# Allegro board megaHeatv2_AutoRouted.brd
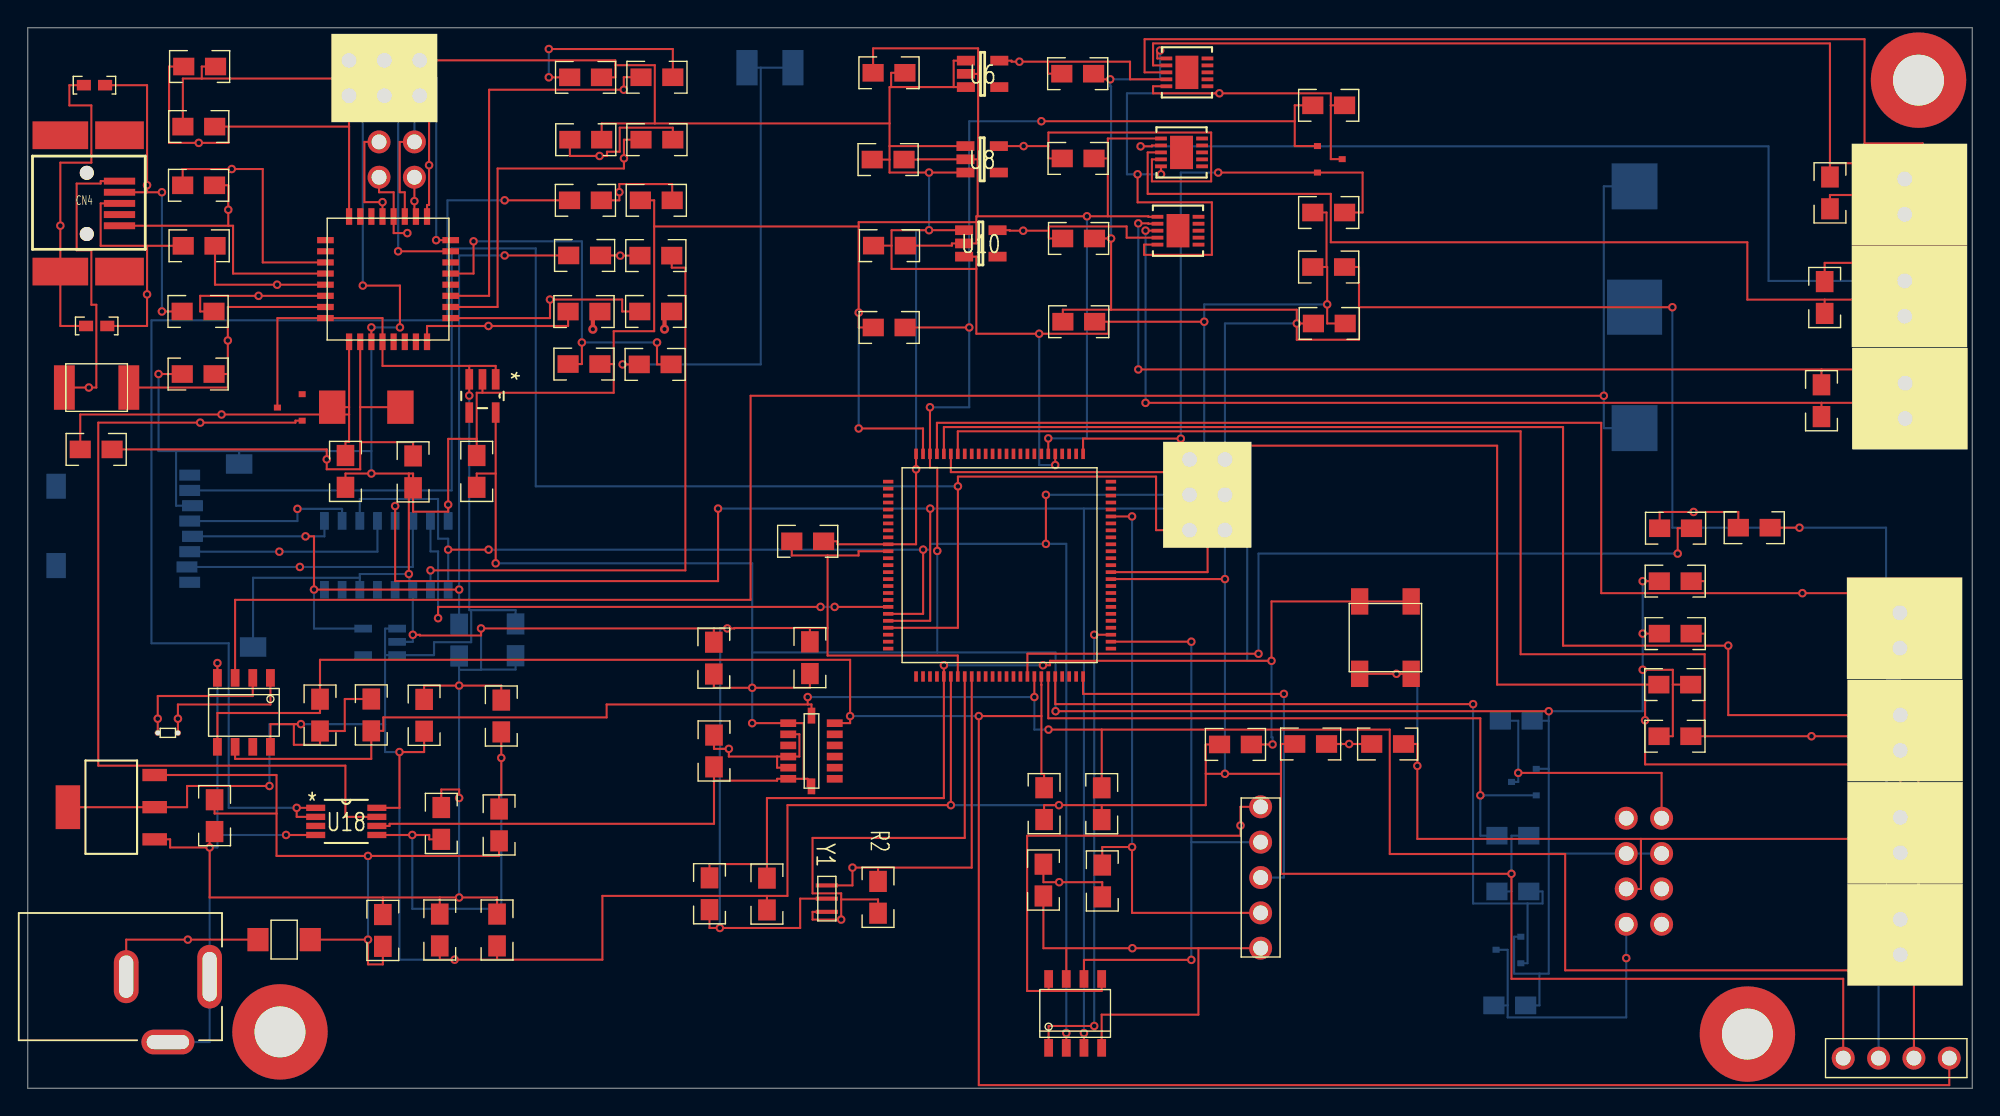
[diagram p0: board, top side]
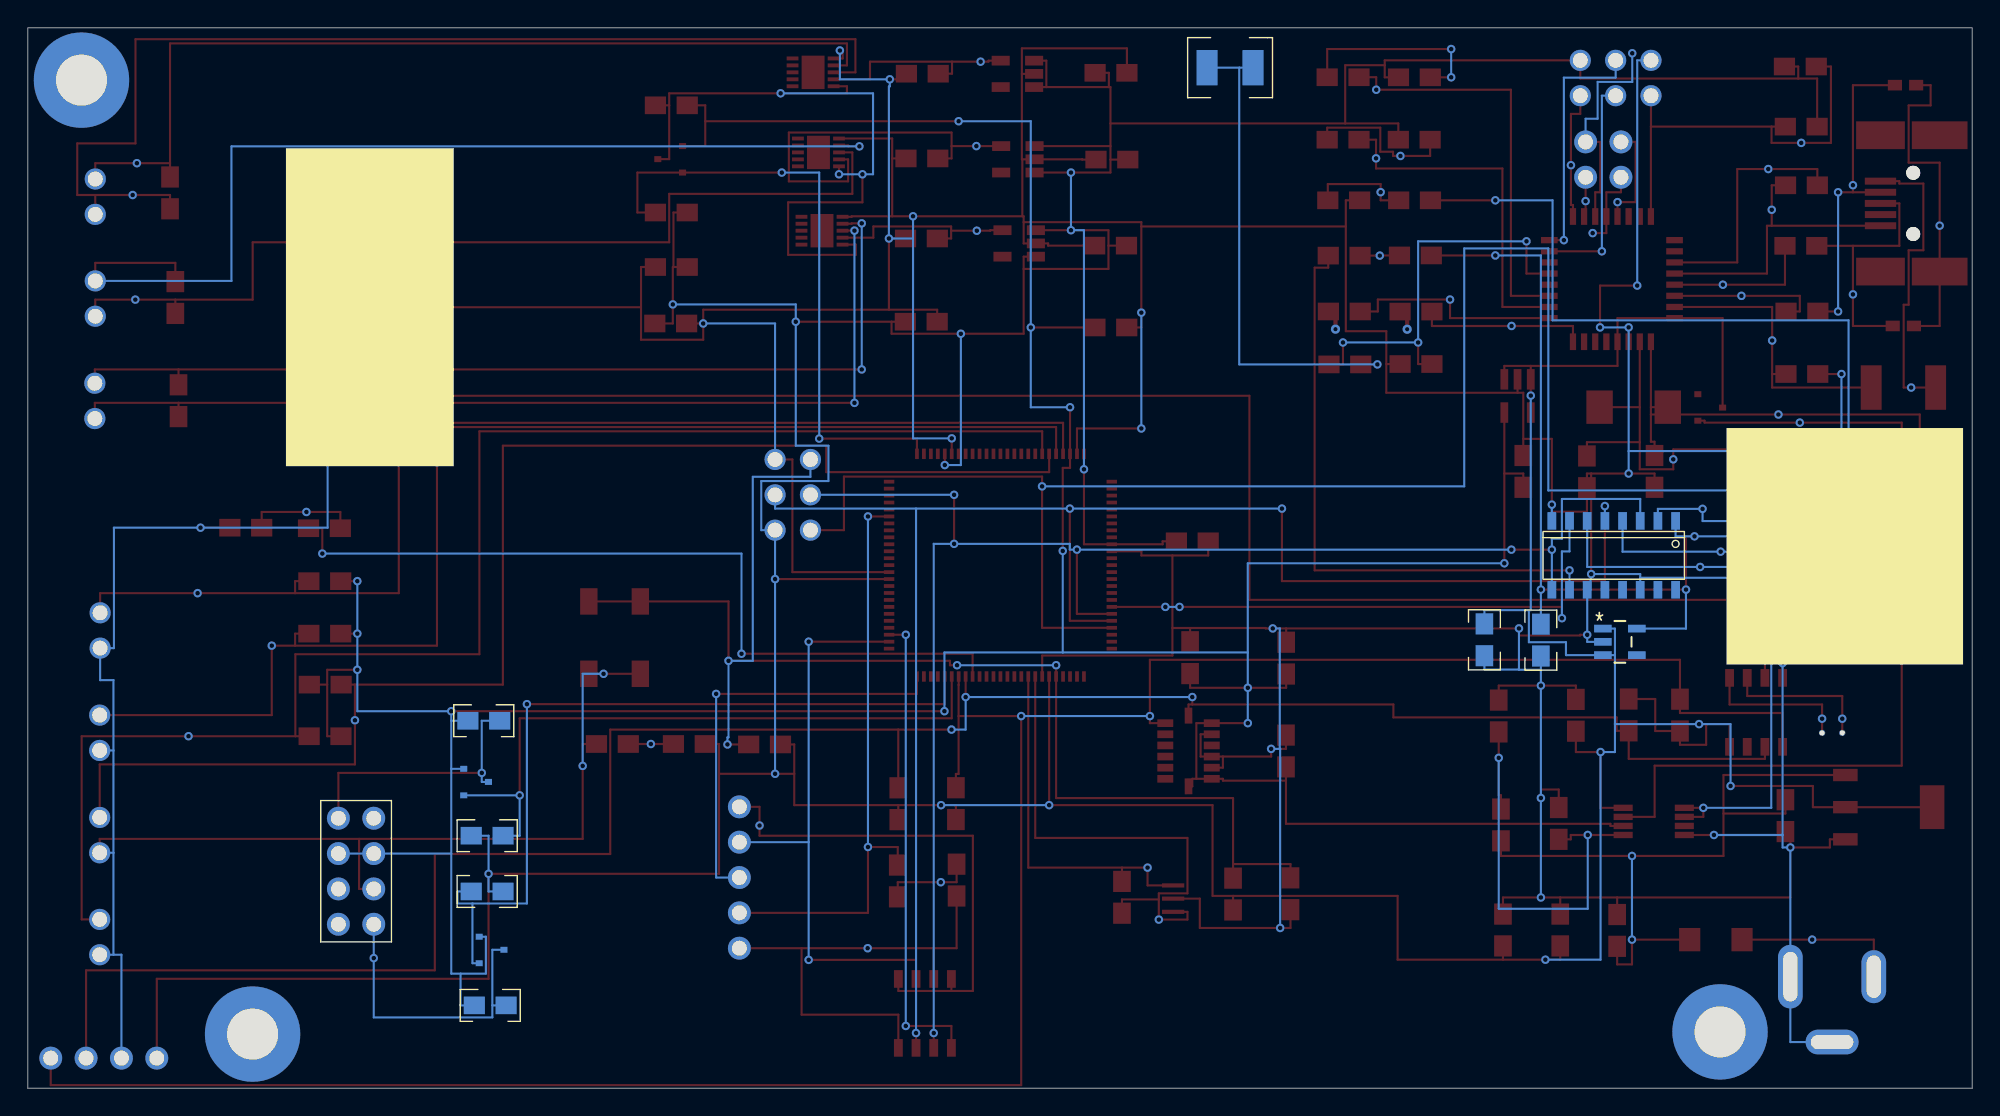
[diagram p1: board, bottom side, seen from below]

Outline 139.7 x 76.2 mm; copper layers: TOP, BOTTOM. Coordinates in mm from the lower left corner of the outline.
Outline path: 0,76.2 139.7,76.2 139.7,0 0,0 0,76.2

## Placement (name value [footprint] x y rotation side)
BT1  CR1220Holder  [CR1220]  115.44 56.12 270 bottom
C1  22P  [0805RF_WV_12D]  48.98 13.97 90 top
C2  100n  [0805RF_WV_12D]  61.89 54.67 0 top
C3  100n  [0805RF_WV_12D]  33.71 11.37 270 top
C4  100n  [0805RF_WV_12D]  75.51 55.08 0 top
C5  100n  [0805RF_WV_12D]  56.03 39.3 0 top
C6  0.1u  [0805RF_WV_12D]  28.47 26.8 90 top
C7  10u/10V  [0805RF_WV_12D]  30.99 32.2 270 bottom
C8  0.1u  [0805RF_WV_12D]  35.05 32.22 270 bottom
C9  0.1uF  [0805RF_WV_12D]  129.48 64.34 90 top
C10  0.1uF  [0805RF_WV_12D]  129.1 56.82 90 top
C11  10uF  [0805RF_WV_12D]  61.87 72.97 0 top
C12  10uF  [0805RF_WV_12D]  61.81 66.73 0 top
C13  10uF  [0805RF_WV_12D]  61.91 60.55 0 top
C14  10uF  [0805RF_WV_12D]  75.43 72.9 0 top
C15  10uF  [0805RF_WV_12D]  75.46 66.81 0 top
C16  10uF  [0805RF_WV_12D]  75.5 61.06 0 top
C22  10u  [0805RF_WV_12D]  49.3 24.23 90 top
C23  0.1u  [0805RF_WV_12D]  49.29 30.91 90 top
C24  0.1u  [0805RF_WV_12D]  56.19 30.94 90 top
C25  47u  [0805RF_WV_12D]  25.51 11.33 90 top
C26  100n  [0805RF_WV_12D]  13.42 19.58 270 top
C27  47u  [0805RF_WV_12D]  29.6 11.37 90 top
C28  1u  [0805RF_WV_12D]  32.25 44.32 90 top
C29  100n  [0805RF_WV_12D]  29.71 19.02 90 top
C30  100n  [0805RF_WV_12D]  12.24 51.32 180 top
C31  1u  [0805RF_WV_12D]  12.27 64.88 0 top
C32  22P  [0805RF_WV_12D]  22.82 44.32 90 top
C33  22P  [0805RF_WV_12D]  27.68 44.29 90 top
C34  100n  [0805RF_WV_12D]  45.07 52.01 0 top
C35  100n  [0805RF_WV_12D]  93.51 54.95 0 top
C36  100n  [0805RF_WV_12D]  93.47 59.01 0 top
C37  0.1uF  [0805RF_WV_12D]  128.87 49.4 90 top
CN1  uSD  [MICROSD]  2.03 31.71 90 bottom
CN3  DC21MMX_POWERSUPPLY  [DC_JACK]  13.06 8.01 180 top
CN4  USB_B MINI  [USBBMINI]  0.34 63.58 0 top
D1  RED  [0805RF_WV_12D]  45.12 59.83 0 top
D4  CD1206-S01575  [0805RF_WV_12D]  53.11 13.95 90 top
D5  M7  [DO21]  18.41 10.67 180 top
D6  GREEN ON  [0805RF_WV_12D]  97.7 24.73 180 top
D7  YELLOW  [0805RF_WV_12D]  45.15 63.8 0 top
D8  YELLOW  [0805RF_WV_12D]  45.2 68.16 0 top
D9  YELLOW  [0805RF_WV_12D]  45.2 72.65 0 top
D10  CD1206-S01575  [0805RF_WV_12D]  12.28 69.1 0 top
D13  RED  [0805RF_WV_12D]  124.04 40.28 180 top
D14  LED  [0805RF_WV_12D]  72.97 14.95 90 top
F2  MF-MSMF050-2 500mA  [FUSE]  4.94 50.35 0 top
J1  ICSP  [ISCP]  83.47 40.1 0 top
J2  CON2  [2X1CONN]  134.85 64.07 0 top
J3  CON2  [2X1CONN]  134.85 56.74 0 top
J4  CON2  [2X1CONN]  134.89 49.39 0 top
J7  HEADER 2x2/SM  [2X2CON]  27.77 65.46 90 top
J8  Reset-EN  [1210RF_WV_12D]  53.32 73.34 180 bottom
J9  HEADER 3x2/SM  [ISCP]  28.16 71.32 90 top
J10  COMM Header  [4X1CONN]  134.25 2.16 90 top
J11  Compressor Control  [5X1CONN]  88.58 15.14 180 top
NOREF  -  [unnamed]  18.12 4.04 0 top
NOREF#2  -  [unnamed]  135.85 72.44 0 top
NOREF#3  -  [unnamed]  123.55 3.89 0 top
Q1  MOSFET N  [SOT23]  93.55 66.76 0 top
Q2  MOSFET N  [SOT23]  106.38 9.94 180 bottom
Q3  MOSFET N  [SOT23]  107.49 22.01 180 bottom
Q4  FDN340P  [SOT23]  18.82 48.91 180 top
R1  10K  [0805RF_WV_12D]  86.77 24.7 0 top
R2  1M  [0805RF_WV_12D]  61.09 13.72 270 top
R3  10K  [0805RF_WV_12D]  73.02 20.45 270 top
R4  10K  [0805RF_WV_12D]  77.16 20.44 270 top
R5  2.2k  [0805RF_WV_12D]  20.99 26.81 90 top
R6  2.2k  [0805RF_WV_12D]  24.68 26.82 90 top
R7  1k  [0805RF_WV_12D]  40 59.84 0 top
R8  10K  [0805RF_WV_12D]  118.36 36.44 0 top
R9  10K  [0805RF_WV_12D]  118.36 32.66 0 top
R10  10K  [0805RF_WV_12D]  118.33 29 0 top
R11  10K  [0805RF_WV_12D]  118.34 25.29 0 top
R12  10K  [0805RF_WV_12D]  93.47 70.63 0 top
R13  10K  [0805RF_WV_12D]  93.47 62.93 0 top
R20  10K  [0805RF_WV_12D]  106.48 5.95 180 bottom
R21  10K  [0805RF_WV_12D]  106.7 14.14 0 bottom
R22  10K  [0805RF_WV_12D]  106.94 26.4 180 bottom
R23  10K  [0805RF_WV_12D]  106.7 18.14 180 bottom
R24  1k  [0805RF_WV_12D]  92.17 24.73 0 top
R25  1k  [0805RF_WV_12D]  40.06 63.8 0 top
R26  10K  [0805RF_WV_12D]  33.86 18.92 90 top
R27  10K  [0805RF_WV_12D]  34.02 26.75 90 top
R28  22R  [0805RF_WV_12D]  12.31 60.53 0 top
R29  22R  [0805RF_WV_12D]  12.23 55.82 0 top
R30  1M  [0805RF_WV_12D]  4.91 45.9 0 top
R31  1k  [0805RF_WV_12D]  39.96 55.81 0 top
R32  1k  [0805RF_WV_12D]  45.11 55.82 0 top
R33  1k  [0805RF_WV_12D]  40.09 68.16 0 top
R34  1k  [0805RF_WV_12D]  40.07 72.64 0 top
R35  1k  [0805RF_WV_12D]  39.96 52.04 0 top
R36  10K  [0805RF_WV_12D]  12.34 73.42 0 top
R39  750  [0805RF_WV_12D]  118.39 40.24 0 top
R40  1k  [0805RF_WV_12D]  77.2 14.89 90 top
RT1  EC95F  [2X1CONN]  134.51 32.89 0 top
RT2  EC95F  [2X1CONN]  134.54 25.54 0 top
RT3  EC95F  [2X1CONN]  134.54 18.19 0 top
RT4  EC95F  [2X1CONN]  134.54 10.86 0 top
RV1  CG0603MLC-05E  [0603RF_WV_12D]  4.95 54.78 0 top
RV2  CG0603MLC-05E  [0603RF_WV_12D]  4.79 72.08 0 top
SW1  SW PUSHBUTTON-SPST-2/SM  [SMDPB]  97.54 32.38 90 top
U1  ATmega2560-TQFP  [MEGA2560]  69.82 37.59 0 top
U2  DS1307  [SOIC8]  15.53 27.01 270 top
U3  CD74HC4050  [SOIC16]  25.76 38.29 270 bottom
U4  LP2983  [MF05A]  25.31 32.07 180 bottom
U5  MAX31850  [TDFN10]  83.28 73 0 top
U6  MIC5225-3.3YM5  [DBV0005A_M]  68.6 72.89 0 top
U7  MAX31850  [TDFN10]  82.89 67.25 0 top
U8  MIC5225-3.3YM5  [DBV0005A_M]  68.57 66.75 0 top
U9  MAX31850  [TDFN10]  82.64 61.62 0 top
U10  MIC5225-3.3YM5  [DBV0005A_M]  68.47 60.71 0 top
U14  ESP8266  [ESP8266_MODULE]  116.12 15.59 180 bottom
U15  -  [ADXL345]  56.31 24.23 0 top
U16  NCP1117ST50T3G  [DCY4]  5.99 20.19 90 top
U17  LP2985  [DBV5]  32.66 49.75 270 top
U18  LMV358IDGKR  [MUA]  22.88 19.17 0 top
U19  ATmega16U2-TQFP  [ATMEGA16U2]  25.88 58.14 90 top
U20  MCP4131  [SOIC8]  75.25 5.37 90 top
Y1  CSTCE16M0V53-R0 16MHZ  [CSTCE16M0V53]  57.41 13.62 270 top
Y2  32.768  [ECS3X8]  10.06 25.53 0 top
Y4  16MHz  [ECX64A]  24.32 48.94 180 top

## Library data of the parts
BT1 = CR1220Holder
C1-C5 C9-C16 C23 C24 C26 C28-C37 = CAPACITOR NON-POL
C6-C8 C22 C25 C27 = C
CN1 = uSD
CN3 = CONN PLUG 3: User Part Number: X; Tolerance: X
CN4 = USB_B MINI
D1 D6-D9 D13 D14 = LED
D4 D5 D10 = DIODE
F2 = FUSE
J1 J9 = HEADER 3x2/SM
J2-J4 = CON2
J7 = HEADER 2x2/SM
J8 = JUMPER
J10 = HEADER 4
J11 = HEADER 5
Q1-Q3 = MOSFET N
Q4 = MOSFET P
R1-R13 R20-R36 R39 R40 = R
RT1-RT4 = THERMISTOR
RV1 RV2 = VARISTOR
SW1 = SW PUSHBUTTON-SPST-2/SM
U1 = ATmega2560-TQFP_1
U2 = DS1307
U3 = CD74HC4050M_0
U4 = LP2983 SOT-23
U5 U7 U9 = MAX31850_0
U6 U8 U10 = MIC5225-3.3YM5
U14 = ESP8266_0
U15 = ADXL345
U16 = NCP1117ST50_0
U17 = LP2985_0
U18 = LMV358
U19 = ATmega16U2-TQFP_1
U20 = MCP4131: Tolerance: ***; User Part Number: ***
Y1 = OSC6/SM
Y2 = CRYSTAL
Y4 = XM/SM

## Footprints (pads in the part's own frame, mm; a bottom-side part is the same pattern mirrored in y, then rotated)
2X1CONN
  round 1.524 hole 1.067: 1(0,1.27) 2(0,-1.27)
2X2CON
  round 1.651 hole 1.067: 1(0,0) 2(0,2.54) 3(2.54,0) 4(2.54,2.54)
4X1CONN
  round 1.651 hole 1.067: 1(0,3.81) 2(0,1.27) 3(0,-1.27) 4(0,-3.81)
5X1CONN
  round 1.651 hole 1.067: 1(0,5.08) 2(0,2.54) 3(0,0) 4(0,-2.54) 5(0,-5.08)
0603RF_WV_12D
  rect 1.016x0.762 smd: 1(-0.762,0) 2(0.762,0)
0805RF_WV_12D
  rect 1.524x1.27 smd: 1(-1.143,0) 2(1.143,0)
1210RF_WV_12D
  rect 1.524x2.54 smd: 1(-1.651,0) 2(1.651,0)
ADXL345
  rect 1.145x0.55 smd: 1(-1.67,2) 2(-1.67,1.2) 3(-1.67,0.4) 4(-1.67,-0.4) 5(-1.67,-1.2) 6(-1.67,-2) 8(1.67,-2) 9(1.67,-1.2) 10(1.67,-0.4) 11(1.67,0.4) 12(1.67,1.2) 13(1.67,2)
  rect 1.145x0.55 smd rot 89.7: 7(0,-2.54) 14(0,2.54)
ATMEGA16U2
  rect 1.2x0.45 smd: 1(-4.5,2.8) 2(-4.5,2) 3(-4.5,1.2) 4(-4.5,0.4) 5(-4.5,-0.4) 6(-4.5,-1.2) 7(-4.5,-2) 8(-4.5,-2.8) 17(4.5,-2.8) 18(4.5,-2) 19(4.5,-1.2) 20(4.5,-0.4) 21(4.5,0.4) 22(4.5,1.2) 23(4.5,2) 24(4.5,2.8)
  rect 0.45x1.2 smd: 9(-2.8,-4.5) 10(-2,-4.5) 11(-1.2,-4.5) 12(-0.4,-4.5) 13(0.4,-4.5) 14(1.2,-4.5) 15(2,-4.5) 16(2.8,-4.5) 25(2.8,4.5) 26(2,4.5) 27(1.2,4.5) 28(0.4,4.5) 29(-0.4,4.5) 30(-1.2,4.5) 31(-2,4.5) 32(-2.8,4.5)
CR1220
  rect 3.302x3.302 smd: 1(-8.687,0) 3(8.687,0)
  rect 3.962x3.962 smd: 2(0,0)
CSTCE16M0V53
  rect 0.3x1.6 smd: 1(-0.95,0) 2(0,0) 3(0.95,0)
DBV5
  rect 1.473x0.559 smd: 1(-1.194,0.95) 2(-1.194,0) 3(-1.194,-0.95) 4(1.194,-0.95) 5(1.194,0.95)
DBV0005A_M
  rect 1.3x0.7 smd: 1(-1.2,0.95) 2(-1.2,0) 3(-1.2,-0.95) 4(1.2,-0.95) 5(1.2,0.95)
DC_JACK
  oval 1.778x4.572 hole 1.016x3.556: 1(0,0)
  oval 1.778x3.81 hole 1.016x3.048: 2(5.994,0)
  oval 3.81x1.778 hole 3.048x1.016: 3(2.997,4.699)
DCY4
  rect 0.889x1.765 smd: 1(-2.311,-3.118) 2(0,-3.118) 3(2.311,-3.118)
  rect 3.15x1.765 smd: 4(0,3.118)
DO21
  rect 1.524x1.676 smd: 1(-1.88,0) 2(1.88,0)
ECS3X8
  round 0.45 hole 0.35: 1(-0.725,0) 2(0.725,0)
ECX64A
  rect 1.9x2.4 smd: 1(-2.45,0) 2(2.45,0)
ESP8266_MODULE
  round 1.651 hole 1.067: 1(-1.27,3.81) 2(-1.27,1.27) 3(-1.27,-1.27) 4(-1.27,-3.81) 5(1.27,3.81) 6(1.27,1.27) 7(1.27,-1.27) 8(1.27,-3.81)
FUSE
  rect 1.5x3.2 smd: 1(-2.315,0) 2(2.315,0)
ISCP
  round 1.524 hole 1.067: 1(0,0) 2(2.54,0) 3(0,2.54) 4(2.54,2.54) 5(0,5.08) 6(2.54,5.08)
MEGA2560
  rect 0.75x0.27 smd: 1(-8,6) 2(-8,5.5) 3(-8,5) 4(-8,4.5) 5(-8,4) 6(-8,3.5) 7(-8,3) 8(-8,2.5) 9(-8,2) 10(-8,1.5) 11(-8,1) 12(-8,0.5) 13(-8,0) 14(-8,-0.5) 15(-8,-1) 16(-8,-1.5) 17(-8,-2) 18(-8,-2.5) 19(-8,-3) 20(-8,-3.5) 21(-8,-4) 22(-8,-4.5) 23(-8,-5) 24(-8,-5.5) 25(-8,-6) 51(8,-6) 52(8,-5.5) 53(8,-5) 54(8,-4.5) 55(8,-4) 56(8,-3.5) 57(8,-3) 58(8,-2.5) 59(8,-2) 60(8,-1.5) 61(8,-1) 62(8,-0.5) 63(8,0) 64(8,0.5) 65(8,1) 66(8,1.5) 67(8,2) 68(8,2.5) 69(8,3) 70(8,3.5) 71(8,4) 72(8,4.5) 73(8,5) 74(8,5.5) 75(8,6)
  rect 0.27x0.75 smd: 26(-6,-8) 27(-5.5,-8) 28(-5,-8) 29(-4.5,-8) 30(-4,-8) 31(-3.5,-8) 32(-3,-8) 33(-2.5,-8) 34(-2,-8) 35(-1.5,-8) 36(-1,-8) 37(-0.5,-8) 38(0,-8) 39(0.5,-8) 40(1,-8) 41(1.5,-8) 42(2,-8) 43(2.5,-8) 44(3,-8) 45(3.5,-8) 46(4,-8) 47(4.5,-8) 48(5,-8) 49(5.5,-8) 50(6,-8) 76(6,8) 77(5.5,8) 78(5,8) 79(4.5,8) 80(4,8) 81(3.5,8) 82(3,8) 83(2.5,8) 84(2,8) 85(1.5,8) 86(1,8) 87(0.5,8) 88(0,8) 89(-0.5,8) 90(-1,8) 91(-1.5,8) 92(-2,8) 93(-2.5,8) 94(-3,8) 95(-3.5,8) 96(-4,8) 97(-4.5,8) 98(-5,8) 99(-5.5,8) 100(-6,8)
MF05A
  rect 1.27x0.559 smd: 1(-1.219,0.953) 2(-1.219,0) 3(-1.219,-0.953) 4(1.219,-0.953) 5(1.219,0.953)
MICROSD
  rect 0.8x1.5 smd: 1(4.65,9.6) 2(5.75,9.4) 3(6.85,9.6) 4(7.95,9.8) 5(9.05,9.6) 6(10.15,9.8) 7(11.25,9.6) 8(12.35,9.6)
  rect 1.8x1.4 smd: 9(11.55,0) 10(5.85,0)
  rect 1.4x1.9 smd: 11(0,14.15) 12(13.15,13.15)
MUA
  rect 1.372x0.457 smd: 1(-2.197,0.975) 2(-2.197,0.325) 3(-2.197,-0.325) 4(-2.197,-0.975) 5(2.197,-0.975) 6(2.197,-0.325) 7(2.197,0.325) 8(2.197,0.975)
SMDPB
  rect 1.9x1.25 smd: 1(-2.6,1.85) 2(-2.6,-1.85) 3(2.6,-1.85) 4(2.6,1.85)
SOIC8
  rect 1.27x0.635 smd: 1(-2.477,1.905) 2(-2.477,0.635) 3(-2.477,-0.635) 4(-2.477,-1.905) 5(2.477,-1.905) 6(2.477,-0.635) 7(2.477,0.635) 8(2.477,1.905)
SOIC16
  rect 1.27x0.635 smd: 1(-2.477,4.445) 2(-2.477,3.175) 3(-2.477,1.905) 4(-2.477,0.635) 5(-2.477,-0.635) 6(-2.477,-1.905) 7(-2.477,-3.175) 8(-2.477,-4.445) 9(2.477,-4.445) 10(2.477,-3.175) 11(2.477,-1.905) 12(2.477,-0.635) 13(2.477,0.635) 14(2.477,1.905) 15(2.477,3.175) 16(2.477,4.445)
SOT23
  rect 0.508x0.432 smd: 1(-0.889,0.94) 2(-0.889,-0.965) 3(0.889,0)
TDFN10
  rect 1.65x2.4 smd: (0,0)
  rect 0.85x0.28 smd: 1(-1.475,1) 2(-1.475,0.5) 3(-1.475,0) 4(-1.475,-0.5) 5(-1.475,-1) 6(1.475,-1) 7(1.475,-0.5) 8(1.475,0) 9(1.475,0.5) 10(1.475,1)
unnamed
  round 6.858 hole 3.658: (0,0)
USBBMINI
  rect 2.25x0.5 smd: 1(6.251,1.6) 2(6.251,0.8) 3(6.251,0) 4(6.248,-1.605) 5(6.248,-0.803)
  round 1.001 hole 1.001: 6(3.899,2.2) 7(3.899,-2.2)
  rect 4x1.999 smd: 8(1.999,4.9) 10(1.999,-4.9)
  rect 3.5x1.999 smd: 9(6.251,4.9) 11(6.251,-4.9)

## Nets
3V3: C2.2 C22.1 C23.1 C24.1 C28.1 Q1.1(GATE) Q2.1(GATE) Q3.1(GATE) R8.1 R9.1 R10.2 R11.1 R12.1 R20.1 R22.1 U1.98(AREF) U14.2(VCC) U14.6(CHPD) U15.1(VDD) U15.6(VSS) U15.7(CS) U17.5(OUT) U18.6(2IN-)
3V3_A1: C14.1 U5.4(VDD) U6.5(OUT)
3V3_A2: C15.1 U7.4(VDD) U8.5(OUT)
3V3_A3: C16.1 U9.4(VDD) U10.5(OUT)
5V: C3.2 C4.2 C5.2 C6.1 C8.1 C11.2 C12.1 C13.1 C27.1 C35.2 C36.1 D4.1(K) D10.1(K) J1.2 J9.2 J10.1 Q4.3(SOURCE) R1.1 R3.2 R4.2 R5.1 R6.2 R13.1 R21.1 R23.1 R24.1 R33.2 R34.2 R36.2 U1.10(VCC) U1.31(VCC0) U1.61(VCC1) U1.80(VCC2) U1.100(AVCC) U2.8(VCC) U4.1(VIN) U4.3(ON/OFF) U6.1(IN) U6.3(EN) U8.1(IN) U8.3(EN) U10.1(IN) U10.3(EN) U16.2(OUT) U16.4(TAB) U17.1(IN) U17.3(ON/OFF) U18.8(VCC) U19.4(VCC) U19.32(AVCC)
5V_COMP: J11.5 U20.5(P0A) U20.8(VDD)
GND: BT1.2(NEG) C1.1 C2.1 C3.1 C4.1 C5.1 C6.2 C7.2 C8.2 C11.1 C12.2 C13.2 C14.2 C15.2 C16.2 C22.2 C23.2 C24.2 C25.2 C26.2 C27.2 C28.2 C29.2 C30.2 C32.1 C33.1 C35.1 C36.2 CN1.6(VSS) CN1.11(MT1) CN1.12(MT2) CN3.1 CN3.3 D6.1(CATHODE) D7.1(CATHODE) D13.1(CATHODE) J1.6 J9.6 J10.2 R27.2 R35.2 RT1.2 RT2.2 RT3.2 RT4.2 SW1.1 SW1.2 U1.11(GND) U1.32(GND0) U1.62(GND1) U1.81(GND2) U1.99(AGND) U2.4(GND) U3.8(GND) U3.11(5A) U3.14(6A) U4.2(GND) U5.1(GND) U6.2(GND) U7.1(GND) U8.2(GND) U9.1(GND) U10.2(GND) U14.7(GND) U15.2(GND) U15.4(GND1) U15.5(GND2) U16.1(GND) U17.2(GND) U18.4(GND) U19.3(GND) Y1.2
GND_COMP: D14.1(CATHODE) J11.1 U20.4(VSS) U20.7(P0B)
VDD: C7.1 CN1.4(VDD) R7.1 U3.1(VCC) U4.5(VOUT)
VIN: C25.1 C26.1 D5.1(K) R26.1 U16.3(IN)
A0: R8.2 RT1.1 U1.97(PF0)
A1: R9.2 RT2.1 U1.96(PF1)
A2: R10.1 RT3.1 U1.95(PF2)
A3: R11.2 RT4.1 U1.94(PF3)
ADC4: U1.93(PF4)
ADC5: U1.92(PF5)
ADC6: U1.91(PF6)
ADC7: U1.90(PF7)
ADC8: U1.89(PK0)
ADC9: U1.88(PK1)
ADC10: U1.87(PK2)
ADC11: U1.86(PK3)
ADC12: U1.85(PK4)
ADC13: U1.84(PK5)
ADC14: U1.83(PK6)
ADC15: U1.82(PK7)
CD: CN1.9(CD1)
CMP: C29.1 R26.2 R27.1 U18.5(2IN+)
CS: CN1.2(CS) U3.6(3Y)
D8: U1.16(PH4)
D24: Q1.2(DRAIN) R13.2 U1.76(PA2)
D37: U1.53(PC0) U20.1(CS)
D38: J11.3 U1.50(PD7)
D39: J11.2 R40.2 U1.70(PG2)
D40: J11.4 U1.52(PG1) U20.6(P0W)
D41: R39.2 U1.42(PL7)
D50: CN1.7(DATA_OUT) J1.1 U1.22(PB3)
D51: J1.4 U1.21(PB2) U3.5(2A) U20.3(SDI)
D52: J1.3 U1.20(PB1) U3.3(1A) U3.9(4A) U20.2(SCK)
D53: U1.19(PB0) U3.7(3A)
D+: CN4.3(D+) R28.1 RV1.2
D-: CN4.2(D-) R29.1 RV2.2
DATA: Q1.3(SOURCE) R12.2 U5.5(DQ) U7.5(DQ) U9.5(DQ)
DATA_IN: CN1.3(DATA_IN) U3.4(2Y)
GATE_CMD: Q4.1(GATE) U18.7(2OUT)
M8RXD: R32.1 U19.9(PD3)
M8TXD: R31.1 U19.8(PD2)
MISO2: J9.1 U19.17(PB3)
MOSI2: J9.4 U19.16(PB2)
PA0: U1.78(PA0)
PA1: U1.77(PA1)
PA3: U1.75(PA3)
PA4: U1.74(PA4)
PA5: U1.73(PA5)
PA6: U1.72(PA6)
PA7: U1.71(PA7)
PB4: U1.23(PB4)
PB5: U1.24(PB5)
PB6: U1.25(PB6)
PB7: U1.26(PB7)
PB7_118442: U18.3(1IN+)
PC1: U1.54(PC1)
PC2: U1.55(PC2)
PC3: U1.56(PC3)
PC4: U1.57(PC4)
PC5: U1.58(PC5)
PC6: U1.59(PC6)
PC7: U1.60(PC7)
PE3: U1.5(PE3)
PE4: U1.6(PE4)
PE5: U1.7(PE5)
PG0: U1.51(PG0)
PG5: U1.1(PG5)
PH3: U1.15(PH3)
PH5: U1.17(PH5)
PH6: U1.18(PH6)
PL0: U1.35(PL0)
PL1: U1.36(PL1)
PL2: U1.37(PL2)
PL3: U1.38(PL3)
PL4: U1.39(PL4)
PL5: U1.40(PL5)
PL6: U1.41(PL6)
RD+: R28.2 U19.29(D+)
RD-: R29.2 U19.30(D-)
RESET: C1.2 D4.2(A) J1.5 R1.2 SW1.3 SW1.4 U1.30(RESET)
RESET2: D10.2(A) J9.5 R36.1 U19.24(RESET)
RESET_70272: C34.1 J8.1 J8.2
RX: Q3.3(SOURCE) R22.2 U14.1(URXD)
RX0: U1.2(PE0)
RX0_71255: R32.2
RX1: Q3.2(DRAIN) R23.2 U1.45(PD2)
RXD2: U1.12(PH0)
RXD3: U1.63(PJ0)
RXL: D8.1(CATHODE) U19.10(PD4)
SCK: CN1.5(SCLK) U3.2(1Y)
SCK2: J9.3 U19.15(PB1)
SCL: J10.3 R4.1 R6.1 U1.43(PD0) U2.6(SCL) U15.14(SCL)
SDA: J10.4 R3.1 R5.2 U1.44(PD1) U2.5(SDA) U15.13(SDA)
T1+: C9.1 J2.2 U5.3(T+)
T1-: C9.2 J2.1 U5.2(T-)
T2+: C10.1 J3.2 U7.3(T+)
T2-: C10.2 J3.1 U7.2(T-)
T3+: C37.1 J4.2 U9.3(T+)
T3-: C37.2 J4.1 U9.2(T-)
TX: Q2.3(SOURCE) R20.2 U14.8(UTXD)
TX0: U1.3(PE1)
TX0_71283: R31.2
TX1: Q2.2(DRAIN) R21.2 U1.46(PD3)
TXD2: U1.13(PH1)
TXD3: U1.64(PJ1)
TXL: D9.1(CATHODE) U19.11(PD5)
UGND: C31.2 CN4.4(GND) U19.28(UGND)
USBVCC: Q4.2(DRAIN)
USBVCC_67256: C30.1 F2.2 U19.31(UVCC)
XTAL1: R2.1 U1.34(XTAL1) Y1.1
XTAL2: R2.2 U1.33(XTAL2) Y1.3
N49913: U5.6(AD0)
N49921: U5.7(AD1)
N49929: U5.8(AD2)
N49937: U5.9(AD3)
N50039: U7.6(AD0)
N50047: U7.7(AD1)
N50055: U7.8(AD2)
N50063: U7.9(AD3)
N50153: U9.6(AD0)
N50161: U9.7(AD1)
N50169: U9.8(AD2)
N50177: U9.9(AD3)
N67463: C32.2 R30.1 U19.1(XTAL1) Y4.2
N67475: C33.2 R30.2 U19.2((PC0)XTAL2) Y4.1
N69961: J7.1(3) U19.18(PB4)
N69973: J7.2(4) U19.20(PB6)
N69986: J7.3(1) U19.19(PB5)
N69998: J7.4(2) U19.21(PB7)
N70138: C34.2 R35.1 U19.13(PD7)
N74387: CN4.10(MT3) RV1.1 RV2.1
N75068: C31.1 U19.27(UCAP)
N94564: U2.1(X1) Y2.2
N94576: U2.2(X2) Y2.1
N95840: D1.2(ANODE) U3.10(4Y)
N95896: D1.1(CATHODE) R7.2
N117689: CN3.2 D5.2(A)
N118450: R25.1 U18.1(1OUT) U18.2(1IN-)
N147126: BT1.1(PW1) BT1.3(PW2) U2.3(VBAT)
N705510: D9.2(ANODE) R34.1
N709150: D8.2(ANODE) R33.1
N742370: CN4.1(VCC) F2.1
N1183820: D6.2(ANODE) R24.2
N1184920: D7.2(ANODE) R25.2
N1866050: D13.2(ANODE) R39.1
N1976830: D14.2(ANODE) R40.1

Pads without a net: CN1 1 8 10; CN4 5 6 7 8 9 11; U1 4 8 9 14 27 28 29 47 48 49 65 66 67 68 69 79; U2 7; U3 12 13 15 16; U4 4; U5 10; U6 4; U7 10; U8 4; U9 10; U10 4; U14 3 4 5; U15 3 8 9 10 11 12; U17 4; U19 5 6 7 12 14 22 23 25 26

## Via types
v1: diameter 0.61, hole 0.33, TOP to BOTTOM, 175 vias
v2: diameter 0.66, hole 0.305, TOP to BOTTOM, 2 vias

## Routing (per net, layer and track width the routed paths; a pad name or vN(x,y) marks a point on that pad's centre or on a via; arc(x,y) is an arc through that point)
3V3: length 298.3
  TOP w0.152: 118.19,29 118.19,30.07 v1(116.03,30.07) ; 118.19,29 118.19,25.29 R11.1 ; 118.19,29 R10.2 ; 55.74,22.23 U15.6 53.83,22.23 53.83,22.1 49.3,22.1 ; 55.74,22.23 56.03,22.23 56.03,21.69 U15.7 ; 55.74,22.23 55.74,26.23 U15.1 v1(52.04,26.23) ; 91.03,69.49 91.03,67.7 Q1.1 ; 91.03,69.49 v1(72.82,69.49) ; 91.03,69.49 91.03,70.63 R12.1 ; C24.1 56.19,28.77 v1(52.04,28.77) 49.29,28.77 C23.1 ; v1(33.61,37.72) 33.61,44.17 ; 33.61,44.17 U17.5 ; 33.61,44.17 32.25,44.17 C28.1 ; R9.1 v1(116.03,32.66) ; v1(65.34,38.61) 65.34,44.58 64.82,44.58 U1.98 v1(64.82,48.93) ; 49.3,22.1 C22.1 ; 49.3,22.1 49.3,19 25.99,19 25.99,18.85 U18.6 ; R8.1 v1(116.03,36.44) ; v1(73.84,27.09) v1(109.28,27.09) ; C2.2 v1(67.64,54.67)
  BOTTOM w0.152: v1(33.61,37.72) 52.04,37.72 52.04,31.31 ; R20.1 108.61,5.95 108.61,8.23 ; 65.34,31.31 73.84,31.31 v1(73.84,27.09) ; 65.34,31.31 52.04,31.31 ; 65.34,31.31 v1(65.34,38.61) ; U14.2 U14.6 109.28,16.86 ; R22.1 109.28,26.4 ; 109.28,26.4 v1(109.28,27.09) 116.03,27.09 v1(116.03,30.07) v1(116.03,32.66) v1(116.03,36.44) ; 109.28,26.4 109.28,22.95 ; 52.04,31.31 v1(52.04,28.77) v1(52.04,26.23) ; Q2.1 106.79,10.88 106.79,8.23 108.61,8.23 ; 109.28,16.86 109.28,8.23 108.61,8.23 ; 109.28,16.86 109.28,22.95 ; 109.28,22.95 Q3.1 ; v1(72.82,69.49) 67.64,69.49 v1(67.64,54.67) 67.64,48.93 v1(64.82,48.93)
3V3_A1: length 15.2
  TOP w0.152: 73.3,73.77 79.19,73.77 79.19,72.5 U5.4 ; 73.3,73.77 73.3,72.9 C14.1 ; 73.3,73.77 v1(71.24,73.77) 70.68,73.77 70.68,73.84 U6.5
3V3_A2: length 28.1
  TOP w0.152: C15.1 73.33,66.81 73.33,67.7 ; 73.33,67.7 73.33,68.68 85.02,68.68 85.02,65.17 80.76,65.17 80.76,66.75 U7.4 ; 73.33,67.7 v1(71.55,67.7) U8.5
3V3_A3: length 14.2
  TOP w0.152: 73.36,61.62 73.36,61.93 78.95,61.93 78.95,61.12 U9.4 ; 73.36,61.62 v1(71.52,61.62) 70.55,61.62 70.55,61.66 U10.5 ; 73.36,61.62 73.36,61.06 C16.1
5V: length 556.4
  TOP w0.152: Q4.3 17.93,55.34 U19.32 25.48,55.34 U19.4 25.48,51.9 31.71,51.9 ; 77.64,55.08 v1(84.52,55.08) ; 77.64,55.08 77.64,54.22 v1(72.66,54.22) 68.15,54.22 68.15,58.87 ; 77.64,55.08 C4.2 ; 42.21,73.51 42.21,73.86 J9.2 28.16,72.56 12.5,72.56 ; 42.21,73.51 42.21,72.64 R34.2 ; 42.21,73.51 45.05,73.51 45.05,69.33 ; 31.71,51.9 33.61,51.9 U17.1 ; 31.71,51.9 U17.3 v1(31.71,49.77) ; 45.05,69.33 41.23,69.33 R33.2 ; 45.05,69.33 61.91,69.33 ; 19.11,26.16 17.43,26.16 U2.8 ; 19.11,26.16 v1(19.62,26.16) ; 19.11,26.16 19.11,24.68 20.99,24.68 R5.1 22.77,25.67 22.77,27.97 R6.2 ; R24.1 90.04,24.73 90.04,22.59 ; U8.3 v1(64.75,65.8) 61.91,65.8 61.91,66.73 ; 84.63,22.59 84.63,20.34 77.16,20.34 ; 84.63,22.59 84.63,24.7 R1.1 ; 84.63,22.59 v1(86.01,22.59) 90.04,22.59 ; 77.16,20.34 v1(74.09,20.34) 73.02,20.34 R3.2 ; 77.16,20.34 R4.2 ; J10.1 130.44,7.86 106.6,7.86 v1(106.6,15.41) 90.04,15.41 90.04,22.59 ; 93.31,59.01 93.36,59.01 v1(93.36,56.32) 93.36,54.95 C35.2 ; 93.31,59.01 C36.1 ; 93.31,59.01 93.31,62.93 R13.1 ; D10.1 11.14,72.56 12.5,72.56 ; 68.15,58.87 62.06,58.87 62.06,60.55 ; 68.15,58.87 68.15,59.76 U10.3 ; 62.06,60.55 62.06,61.66 v1(64.75,61.66) U10.1 ; 62.06,60.55 C13.1 ; C3.2 33.71,9.23 ; 33.71,9.23 41.28,9.23 41.28,13.82 53.11,13.82 ; 33.71,9.23 v1(30.66,9.23) 29.6,9.23 C27.1 ; 66.52,71.94 62.03,71.94 ; 66.52,71.94 U6.3 ; 66.52,71.94 66.52,73.84 U6.1 ; 62.03,71.94 61.91,71.94 61.91,69.33 ; 62.03,71.94 62.03,72.97 C11.2 ; U1.100 v1(63.82,44.47) 63.82,39.09 U1.10 58.17,39.09 58.17,39.3 C5.2 ; 12.5,72.56 12.5,73.42 R36.2 ; U16.4 U16.2 11.44,20.19 11.44,21.72 v1(17.36,21.72) ; 61.91,69.33 61.91,67.7 ; U1.61 v1(86.01,36.59) ; U1.80 v1(73.82,44.78) ; 53.11,13.82 54.58,13.82 54.58,20.34 v1(66.32,20.34) U1.31 ; 53.11,13.82 D4.1 ; U18.8 26.7,20.15 v1(26.7,24.16) 28.47,24.16 C6.1 ; 61.91,67.7 U8.1 ; 61.91,67.7 61.91,66.73 ; 61.91,66.73 C12.1
  BOTTOM w0.152: v1(72.66,54.22) 72.66,44.78 v1(73.82,44.78) ; v1(93.36,56.32) 84.52,56.32 v1(84.52,55.08) 84.52,46.17 82.18,46.17 82.18,43.63 87,43.63 87,40.1 J1.2 v1(86.01,36.59) v1(86.01,22.59) ; C8.1 35.05,34.35 31.85,34.35 ; v1(64.75,65.8) v1(64.75,61.66) 63.82,61.66 v1(63.82,44.47) ; R21.1 106.6,14.14 v1(106.6,15.41) 106.6,18.14 R23.1 ; 31.85,34.35 31.71,34.35 v1(31.71,49.77) ; 31.85,34.35 31.85,32.05 29.18,32.05 29.18,31.12 U4.3 25.67,31.12 ; 25.67,31.12 25.67,33.03 U4.1 ; 25.67,31.12 25.67,26.16 ; 25.67,26.16 25.67,24.16 v1(26.7,24.16) 26.7,9.23 v1(30.66,9.23) ; 25.67,26.16 v1(19.62,26.16) 17.36,26.16 v1(17.36,21.72) ; v1(74.09,20.34) v1(66.32,20.34)
5V_COMP: length 37.1
  TOP w0.152: U20.8 73.34,6.99 ; 73.34,6.99 71.8,6.99 71.8,18.14 87.13,18.14 v1(87.13,18.88) 87.13,20.22 J11.5 ; 73.34,6.99 77.15,6.99 U20.5
GND: length 741.2
  TOP w0.152: 57.46,38.28 54.89,38.28 C5.1 ; 57.46,38.28 57.46,33.07 ; 57.46,38.28 59.69,38.28 59.69,38.59 U1.11 ; 59.7,61.93 v1(59.7,55.73) 59.7,54.67 C2.1 ; 59.7,61.93 45,61.93 ; 59.7,61.93 59.7,62.23 68.15,62.23 ; U1.32 66.82,31.09 57.46,31.09 57.46,33.07 ; 95.64,56.12 95.64,53.78 91.17,53.78 v1(91.17,54.95) ; 95.64,56.12 v1(118.16,56.12) ; 95.64,56.12 95.64,59.01 C36.2 ; 53.83,23.83 U15.4 55.44,23.83 55.44,25.43 U15.2 ; 53.83,23.83 50.37,23.83 v1(50.37,24.38) 49.3,24.38 C22.2 ; 53.83,23.83 53.83,23.03 U15.5 ; 42.09,52.04 42.09,49.97 32.66,49.97 ; 42.09,52.04 42.09,54.4 45,54.4 45,61.93 ; 42.09,52.04 R35.2 ; v1(81.35,74.57) 81.15,74.57 81.15,74 U5.1 ; 77.6,62.66 80.51,62.66 80.51,62.62 U9.1 ; 77.6,62.66 v1(76.1,62.66) 68.25,62.66 ; 77.6,62.66 77.6,66.81 ; 68.25,62.66 68.25,66.75 ; 68.25,62.66 68.15,62.66 68.15,62.23 ; 68.25,66.75 68.28,66.75 68.28,72.89 ; 68.25,66.75 U8.2 63.94,66.75 63.94,66.73 C12.2 ; 29.6,13.7 25.51,13.7 ; 29.6,13.7 v1(30.99,13.7) 33.71,13.7 C3.1 ; 29.6,13.7 C27.2 ; 25.51,13.7 C25.2 ; 25.51,13.7 13.06,13.7 v1(13.06,17.3) ; C1.1 48.98,11.51 v1(49.72,11.51) 55.49,11.51 55.49,13.62 Y1.2 ; U16.1 10.22,17.88 10.22,17.3 v1(13.06,17.3) ; C16.2 v1(77.83,61.06) 77.83,55.94 ; 77.83,55.94 74.36,55.94 C4.1 ; 77.83,55.94 91.17,55.94 v1(91.17,54.95) ; D13.1 v1(127.29,40.28) ; 68.15,62.23 68.15,60.71 U10.2 66.39,60.71 66.39,60.55 C13.2 ; 32.25,46.66 30.2,46.66 v1(30.2,41.94) 30.2,41.43 27.68,41.43 C33.1 27.68,44.17 27.37,44.17 ; 32.25,46.66 C28.2 ; 32.25,46.66 32.25,49.97 32.66,49.97 ; 32.66,49.97 U17.2 ; U7.1 77.6,68.25 77.6,66.81 ; v1(27.66,32.58) 28.17,32.58 28.17,32.53 32.56,32.53 v1(32.56,33.04) 49.29,33.04 ; C6.2 28.47,28.93 v1(30.99,28.93) 34.02,28.93 R27.2 ; v1(59.7,47.41) 64.32,47.41 U1.99 ; C35.1 v1(91.17,54.95) ; SW1.2 v1(98.34,29.78) SW1.1 ; C24.2 56.19,33.07 ; 56.19,33.07 50.76,33.07 50.76,33.04 v1(50.25,33.04) 49.29,33.04 ; 56.19,33.07 57.46,33.07 ; D6.1 99.83,24.73 v1(99.83,23.16) 99.83,17.91 115.9,17.91 ; C30.2 v1(9.39,51.32) ; U2.4 v1(13.62,30.55) ; C26.2 13.06,18.44 v1(13.06,17.3) ; 115.9,17.91 134.54,17.91 RT3.2 ; 115.9,17.91 115.9,14.32 U14.7 ; C32.1 22.82,44.17 v1(24.68,44.17) 27.37,44.17 ; C23.2 49.29,33.04 ; 45,61.93 45,63.8 D7.1 ; C15.2 77.6,66.81 ; v1(26.74,54.67) 26.74,57.68 v1(24.07,57.68) ; J1.6 84.77,45.18 84.77,37.09 U1.62 ; U18.4 v1(18.55,18.2) ; 27.37,44.17 v1(27.37,36.95) ; v1(77.77,72.5) 76.57,72.5 C14.2 ; v1(30.99,20.85) 30.99,21.46 29.71,21.46 C29.2 ; U1.81 v1(73.32,46.7) ; 68.28,72.89 68.28,74.73 60.73,74.73 C11.1 ; 68.28,72.89 U6.2 ; U19.3 v1(24.68,54.67)
  BOTTOM w0.152: 133.55,16.92 RT3.2 ; 133.55,16.92 133.55,24.27 ; 133.55,16.92 133.55,9.59 ; J9.6 24.07,73.86 v1(24.07,57.68) ; 133.55,9.59 132.98,9.59 J10.2 ; 133.55,9.59 RT4.2 ; 10.65,45.78 10.65,41.86 CN1.6 ; 10.65,45.78 9.39,45.78 v1(9.39,51.32) ; 10.65,45.78 15.18,45.78 ; 76.1,61.06 v1(77.83,61.06) 77.83,71.99 77.77,71.99 v1(77.77,72.5) 81.35,72.5 v1(81.35,74.57) ; 76.1,61.06 v1(76.1,62.66) ; 76.1,61.06 76.1,46.7 v1(73.32,46.7) ; v1(50.25,33.04) 49.75,33.04 49.75,24.38 ; v1(59.7,55.73) v1(59.7,47.41) ; v1(26.74,54.67) v1(24.68,54.67) 24.68,45.78 ; v1(24.68,44.17) 24.68,45.78 ; 24.68,45.78 15.18,45.78 ; 15.18,45.78 CN1.12 ; v1(13.62,30.55) 13.62,18.2 ; 13.62,18.2 13.62,17.3 v1(13.06,17.3) CN3.1 13.06,3.31 CN3.3 ; 13.62,18.2 v1(18.55,18.2) ; 32.56,30.09 35.05,30.09 C8.2 ; 32.56,30.09 v1(32.56,33.04) ; 32.56,30.09 32.56,30.07 30.99,30.07 ; CN1.11 16.18,36.68 23.85,36.68 ; U3.8 v1(30.2,41.94) ; 133.55,24.27 133.55,29.32 134.51,29.32 RT1.2 133.52,31.62 133.52,40.28 v1(127.29,40.28) 118.16,40.28 v1(118.16,56.12) BT1.2 ; 133.55,24.27 RT2.2 ; 23.85,36.68 U3.14 ; 23.85,36.68 23.85,36.95 v1(27.37,36.95) 27.42,36.95 27.42,35.81 U3.11 v1(27.66,32.58) 27.66,32.07 U4.2 ; 30.99,30.07 v1(30.99,28.93) v1(30.99,20.85) v1(30.99,13.7) ; 30.99,30.07 C7.2 ; 49.75,24.38 49.72,24.38 v1(49.72,11.51) ; 49.75,24.38 v1(50.37,24.38) ; v1(99.83,23.16) 99.83,29.78 v1(98.34,29.78) ; J1.6 86.01,54.95 v1(91.17,54.95)
GND_COMP: length 35.7
  TOP w0.152: 74.61,10.06 72.97,10.06 D14.1 ; 74.61,10.06 v1(79.36,10.06) 84.11,10.06 ; 74.61,10.06 U20.7 ; 84.11,10.06 84.11,5.28 77.15,5.28 U20.4 ; 84.11,10.06 J11.1
VDD: length 66.2
  TOP w0.152: v1(19.95,39.66) 20.56,39.66 v1(20.56,35.83) v1(30.99,35.83) ; R7.1 v1(34.26,59.84)
  BOTTOM w0.152: v1(34.26,59.84) 30.99,59.84 v1(30.99,35.83) C7.1 ; U3.1 21.31,39.66 v1(19.95,39.66) CN1.4 ; v1(20.56,35.83) 20.56,33.03 U4.5
VIN: length 51.4
  TOP w0.152: 17.87,19.74 13.42,19.74 C26.1 ; 17.87,19.74 17.87,22.5 U16.3 ; 17.87,19.74 17.87,16.69 v1(24.44,16.69) 33.86,16.69 R26.1 ; C25.1 25.51,8.9 24.44,8.9 v1(24.44,10.67) D5.1
  BOTTOM w0.152: v1(24.44,10.67) v1(24.44,16.69)
A0: length 86.9
  TOP w0.152: 120.5,35.57 113.05,35.57 113.05,47.81 65.32,47.81 U1.97 ; 120.5,35.57 120.5,36.44 R8.2 ; 120.5,35.57 v1(127.5,35.57) 134.51,35.57 RT1.1
A1: length 93.2
  TOP w0.152: U1.96 65.82,47.51 110.3,47.51 110.3,31.8 120.5,31.8 ; 120.5,31.8 v1(122.17,31.8) 122.17,26.81 RT2.1 ; 120.5,31.8 120.5,32.66 R9.2
A2: length 99.1
  TOP w0.152: 116.2,29 105.57,29 105.57,46.17 82.33,46.17 82.33,44.27 66.32,44.27 U1.95 ; 116.2,29 R10.1 ; 116.2,29 v1(116.2,26.44) 116.2,23.27 134.54,23.27 RT3.1
A3: length 108
  TOP w0.152: 120.48,25.29 v1(128.16,25.29) 135.83,25.29 135.83,12.13 RT4.1 ; 120.48,25.29 120.48,31.18 107.26,31.18 107.26,47.21 66.82,47.21 U1.94 ; 120.48,25.29 R11.2
CMP: length 33.2
  TOP w0.152: R26.2 33.86,21.05 34.02,21.05 v1(34.02,23.74) R27.1 ; U18.5 v1(27.62,18.2) 28.84,18.2 28.84,17.88 C29.1
  BOTTOM w0.152: v1(27.62,18.2) 27.62,12.89 34.02,12.89 v1(34.02,23.74)
CS: length 19.5
  BOTTOM w0.152: U3.6 27.66,37.46 v1(19.55,37.46) CN1.2
D24: length 44.5
  TOP w0.152: U1.76 75.82,46.68 v1(82.84,46.68) ; R13.2 95.9,62.93 95.9,65.8 Q1.2 v1(85.53,65.8)
  BOTTOM w0.152: v1(82.84,46.68) 82.84,65.8 v1(85.53,65.8)
D37: length 34.2
  TOP w0.152: U1.53 v1(76.62,32.59) ; U20.1 73.34,4.47 v1(76.62,4.47)
  BOTTOM w0.152: v1(76.62,32.59) v1(76.62,4.47)
D38: length 30.5
  TOP w0.152: U1.50 75.82,28.33 v1(90.25,28.33)
  BOTTOM w0.152: J11.3 90.25,15.14 v1(90.25,28.33)
D39: length 42.7
  TOP w0.152: J11.2 79.34,12.6 v1(79.34,17.33) 77.2,17.33 R40.2 ; U1.70 v1(79.34,41.09)
  BOTTOM w0.152: v1(79.34,41.09) v1(79.34,17.33)
D40: length 42.7
  TOP w0.152: U20.6 75.88,9.22 v1(83.6,9.22) ; U1.52 v1(83.6,32.09)
  BOTTOM w0.152: 83.6,17.68 J11.4 ; 83.6,17.68 v1(83.6,32.09) ; 83.6,17.68 v1(83.6,9.22)
D41: length 58.4
  TOP w0.152: v1(88.42,31.22) 71.82,31.22 U1.42 ; R39.2 118.54,40.24 v1(118.54,38.42)
  BOTTOM w0.152: v1(88.42,31.22) 88.42,38.42 v1(118.54,38.42)
D50: length 126.1
  TOP w0.152: U1.22 66.83,33.09 v1(66.83,43.25) 66.83,43.95 81.06,43.95 81.06,40.1 J1.1
  BOTTOM w0.152: CN1.7 30.45,42.96 30.45,60.35 36.49,60.35 36.49,43.25 v1(66.83,43.25)
D51: length 122.1
  TOP w0.152: U1.21 64.83,33.59 v1(64.83,41.65) ; v1(26.39,41.83) 26.39,36.44 49.59,36.44 v1(49.59,41.65) ; U20.3 v1(75.88,3.96)
  BOTTOM w0.152: v1(49.59,41.65) v1(64.83,41.65) 75.88,41.65 ; 75.88,41.65 86.01,41.65 J1.4 ; 75.88,41.65 v1(75.88,3.96) ; U3.5 v1(26.39,41.83)
D52: length 116.5
  TOP w0.152: v1(33.11,38.7) v1(30.2,38.7) ; v1(73.15,42.64) v1(73.15,39.12) ; U1.20 64.33,34.09 v1(64.33,38.7) ; U20.2 v1(74.61,3.96)
  BOTTOM w0.152: v1(74.61,3.96) 74.61,39.12 v1(73.15,39.12) 64.83,39.12 64.83,38.7 v1(64.33,38.7) v1(33.11,38.7) ; J1.3 v1(73.15,42.64) ; U3.3 23.85,42.34 29.48,42.34 29.48,39.49 30.2,39.49 v1(30.2,38.7) U3.9
D53: length 40.7
  TOP w0.152: v1(56.95,34.59) 29.48,34.59 v1(29.48,33.78) ; U1.19 v1(57.97,34.59)
  BOTTOM w0.152: v1(29.48,33.78) 29.48,38.57 28.93,38.57 U3.7 ; v1(57.97,34.59) v1(56.95,34.59)
D+: length 19
  TOP w0.152: CN4.3 5.23,63.58 5.23,60.53 8.57,60.53 ; 8.57,60.53 R28.1 ; 8.57,60.53 v1(8.57,57.05) 8.57,54.78 RV1.2
D-: length 23.8
  TOP w0.152: R29.1 v1(9.63,55.82) ; RV2.2 8.57,72.08 v1(8.57,64.89) 8.57,64.38 ; 8.57,64.38 CN4.2 ; 8.57,64.38 v1(9.63,64.38)
  BOTTOM w0.152: v1(9.63,55.82) v1(9.63,64.38)
DATA: length 53.9
  TOP w0.152: 93.62,70.63 93.62,66.76 Q1.3 ; 93.62,70.63 R12.2 ; 93.62,70.63 93.62,71.49 v1(85.61,71.49) 80.85,71.49 80.85,72 U5.5 ; v1(79.74,65.67) 79.74,63.66 85.07,63.66 85.07,59.89 80.21,59.89 80.21,60.62 U9.5 ; U7.5 v1(81.42,65.67)
  BOTTOM w0.152: v1(85.61,71.49) 78.97,71.49 78.97,65.67 v1(79.74,65.67) v1(81.42,65.67)
DATA_IN: length 15.7
  BOTTOM w0.152: CN1.3 v1(18.07,38.56) 25.12,38.56 U3.4
GATE_CMD: length 63.1
  TOP w0.152: U18.7 22.82,19.5 22.82,23.18 5.06,23.18 5.06,47.83 v1(12.39,47.83) 19.23,47.83 19.23,47.97 Q4.1
M8RXD: length 15.8
  TOP w0.152: U19.9 37.52,55.34 v1(37.52,56.67) 42.7,56.67 42.7,55.82 R32.1
M8TXD: length 12.3
  TOP w0.152: U19.8 28.68,54.77 v1(33.1,54.77) 38.82,54.77 R31.1
MISO2: length 9.5
  TOP w0.152: U19.17 28.68,63.47 28.83,63.47 v1(28.83,66.33) 28.83,70.02 28.16,70.02 J9.1
MOSI2: length 17.7
  TOP w0.152: U19.16 v1(29.34,60.94)
  BOTTOM w0.152: J9.4 25.62,72.62 29.34,72.62 v1(29.34,60.94)
RD+: length 10.7
  TOP w0.152: U19.29 v1(17.91,57.74) 13.45,57.74 R28.2
RD-: length 11.1
  TOP w0.152: R29.2 12.38,55.82 12.38,56.94 v1(16.58,56.94) U19.30
RESET: length 99.3
  TOP w0.152: v1(72.94,30.39) 73.44,30.39 73.44,30.71 v1(89.36,30.71) 89.36,34.98 SW1.4 SW1.3 ; R1.2 v1(89.43,24.7) ; C1.2 48.98,16.1 53.11,16.1 ; 53.11,16.1 53.11,20.85 65.82,20.85 U1.30 v1(65.82,30.39) ; 53.11,16.1 D4.2
  BOTTOM w0.152: v1(89.43,24.7) 89.43,25.21 89.36,25.21 v1(89.36,30.71) 87.61,30.71 87.61,43.94 83.47,43.94 J1.5 ; v1(65.82,30.39) v1(72.94,30.39)
RESET2: length 30.3
  TOP w0.152: R36.1 10.15,73.42 10.15,67.93 v1(12.28,67.93) 14.41,67.93 14.41,69.1 ; 14.41,69.1 23.08,69.1 ; 14.41,69.1 D10.2 ; U19.24 23.08,69.1 23.08,69.1 ; 23.08,69.1 J9.5
RESET_70272: length 35.7
  TOP w0.152: C34.1 v1(42.74,52.01)
  BOTTOM w0.152: J8.2 52.66,73.34 ; 52.66,73.34 J8.1 ; 52.66,73.34 52.66,52.01 v1(42.74,52.01)
RX: length 19.7
  TOP w0.152: v1(107.09,22.66) 117.39,22.66 U14.1
  BOTTOM w0.152: Q3.3 107.09,22.01 v1(107.09,22.66) 107.09,26.4 R22.2
RX0_71255: length 1.5
  TOP w0.305: v2(45.75,54.55) 45.75,55.31 R32.2
RX1: length 47.7
  TOP w0.152: v1(104.36,21.04) 104.36,26.58 73.32,26.58 U1.45
  BOTTOM w0.152: R23.2 104.36,18.14 v1(104.36,21.04) Q3.2
RXL: length 25.7
  TOP w0.152: U19.10 33.75,56.14 33.75,66.09 42.83,66.09 v1(42.83,66.82) 42.83,68.16 D8.1
SCK: length 12.7
  BOTTOM w0.152: U3.2 22.58,41.63 v1(19.37,41.63) 19.37,40.76 CN1.5
SCK2: length 15.9
  TOP w0.152: U19.15 v1(26.61,60.14)
  BOTTOM w0.152: J9.3 26.61,71.32 v1(26.61,60.14)
SCL: length 158.6
  TOP w0.152: 56.03,27.57 41.59,27.57 41.59,26.64 25.54,26.64 25.54,25.68 R6.1 24.68,23.67 14.89,23.67 U2.6 ; 56.03,27.57 56.31,27.57 U15.14 ; 56.03,27.57 v1(56.03,28.11) ; J10.3 135.52,8.47 110.46,8.47 110.46,16.83 97.85,16.83 97.85,25.77 77.16,25.77 ; 77.16,25.77 v1(73.33,25.77) ; 77.16,25.77 R4.1 ; U1.43 v1(72.32,28.11)
  BOTTOM w0.152: v1(73.33,25.77) 72.32,25.77 v1(72.32,28.11) v1(56.03,28.11)
SDA: length 177.5
  TOP w0.152: U2.5 13.62,26.96 20.99,26.96 R5.2 20.99,30.78 59.08,30.78 v1(59.08,26.74) 59.08,26.23 U15.13 ; 72.83,26.74 v1(68.33,26.74) 68.33,0.22 138.06,0.22 J10.4 ; 72.83,26.74 72.83,22.58 73.02,22.58 R3.1 ; 72.83,26.74 72.83,28.98 72.82,28.98 U1.44
  BOTTOM w0.152: v1(59.08,26.74) v1(68.33,26.74)
T1+: length 80.1
  TOP w0.152: J2.2 134.85,64.19 ; 134.85,64.19 v1(132.17,64.19) 129.48,64.19 C9.1 ; 134.85,64.19 136.15,64.19 136.15,67.89 131.97,67.89 131.97,75.38 80.24,75.38 80.24,73 U5.3
T1-: length 67.3
  TOP w0.152: 129.48,66.47 v1(131.86,66.47) 134.85,66.47 J2.1 ; 129.48,66.47 C9.2 ; 129.48,66.47 129.48,75.08 80.85,75.08 80.85,73.5 U5.2
T2+: length 68.1
  TOP w0.152: C10.1 129.1,56.67 ; 129.1,56.67 123.55,56.67 123.55,60.79 93.62,60.79 93.62,64.27 80.46,64.27 80.46,67.25 U7.3 ; 129.1,56.67 v1(131.98,56.67) 134.85,56.67 J3.2
T2-: length 74.5
  TOP w0.152: U7.2 80.76,67.75 80.76,67.68 v1(79.95,67.68) ; J3.1 134.85,59.31 129.1,59.31 C10.2
  BOTTOM w0.152: v1(79.95,67.68) 125.07,67.68 125.07,58.01 J3.1
T3+: length 69.9
  TOP w0.152: C37.1 128.87,49.25 ; 128.87,49.25 134.89,49.25 J4.2 ; 128.87,49.25 v1(80.31,49.25) ; U9.3 81.16,61.63 v1(80.31,61.63)
  BOTTOM w0.152: v1(80.31,61.63) v1(80.31,49.25)
T3-: length 69.1
  TOP w0.152: U9.2 80.51,62.12 80.51,62.15 v1(79.79,62.15) ; v1(79.79,51.65) 128.87,51.65 ; 128.87,51.65 134.89,51.65 J4.1 ; 128.87,51.65 C37.2
  BOTTOM w0.152: v1(79.79,51.65) v1(79.79,62.15)
TX: length 21.9
  BOTTOM w0.152: 106.32,5.95 106.32,5.09 114.85,5.09 v1(114.85,9.35) U14.8 ; 106.32,5.95 R20.2 ; 106.32,5.95 106.32,9.94 Q2.3
TX0_71283: length 1.5
  TOP w0.305: v2(40.6,54.54) 40.6,55.3 R31.2
TX1: length 58
  TOP w0.152: U1.46 73.82,27.6 v1(103.84,27.6)
  BOTTOM w0.152: R21.2 108.83,14.14 108.83,13.27 107.75,13.27 ; 107.75,13.27 107.75,8.98 Q2.2 ; 107.75,13.27 103.84,13.27 v1(103.84,27.6)
TXL: length 29.4
  TOP w0.152: D9.1 42.82,72.65 v1(42.82,71.75) 33.14,71.75 33.14,56.94 U19.11
UGND: length 22.1
  TOP w0.152: CN4.4 14.4,61.98 ; 14.4,61.98 v1(14.4,63.13) 14.4,64.88 C31.2 ; 14.4,61.98 14.74,61.98 14.74,58.54 U19.28
USBVCC_67256: length 20.9
  TOP w0.152: C30.1 14.37,51.32 ; 14.37,51.32 14.37,50.35 F2.2 ; 14.37,51.32 v1(14.37,53.73) 14.37,56.14 U19.31
XTAL1: length 26.4
  TOP w0.152: U1.34 67.82,15.85 61.09,15.85 ; 61.09,15.85 R2.1 ; 61.09,15.85 v1(59.25,15.85) 59.25,14.57 Y1.1
XTAL2: length 37.7
  TOP w0.152: U1.33 67.32,17.98 56.38,17.98 56.38,14 58.44,14 58.44,13.56 ; 58.44,13.56 61.09,13.56 R2.2 ; 58.44,13.56 v1(58.44,12.12) 56.38,12.12 56.38,12.67 Y1.3
N67463: length 31.5
  TOP w0.152: 23.08,48.94 Y4.2 ; 23.08,48.94 23.08,48.41 ; 23.08,48.94 U19.1 ; 23.08,48.41 23.08,46.46 22.82,46.46 C32.2 ; 23.08,48.41 v1(13.92,48.41) 3.77,48.41 R30.1
N67475: length 36.1
  TOP w0.152: C33.2 27.68,46.42 23.88,46.42 ; R30.2 21.48,45.9 v1(21.48,45.19) 21.48,44.48 23.88,44.48 23.88,46.42 ; 23.88,46.42 23.88,48.94 ; U19.2 23.88,48.94 ; 23.88,48.94 Y4.1
N69961: length 2.9
  TOP w0.152: U19.18 27.77,62.64 v1(27.77,63.75) J7.1
N69973: length 6
  TOP w0.152: v1(27.27,61.45) 26.28,61.45 U19.20 26.28,64.38 25.23,64.38 J7.2
N69986: length 16.5
  TOP w0.152: U19.19 27.08,64.38 26.72,64.38 26.72,68 J7.3
  BOTTOM w0.152: J7.3 27.77,69.67 26.91,69.67 26.91,72.31 24.42,72.31 v1(24.42,74.37)
N69998: length 7.7
  TOP w0.152: J7.4 24.18,68 24.18,63.67 v1(25.48,63.67) U19.21
N70138: length 29.5
  TOP w0.152: C34.2 45.21,52.01 v1(45.21,53.59) ; v1(39.81,53.59) 39.81,52.04 R35.1 ; U19.13 32.02,58.54 v1(32.02,60.86)
  BOTTOM w0.152: v1(45.21,53.59) v1(39.81,53.59) 39.81,60.86 v1(32.02,60.86)
N74387: length 24
  TOP w0.152: RV1.1 2.34,54.78 CN4.10 v1(2.34,61.98) 2.34,66.51 4.56,66.51 4.56,70.62 2.98,70.62 2.98,72.08 RV2.1
N75068: length 18.1
  TOP w0.152: C31.1 11.13,66.05 v1(14.65,66.05) 16.88,66.05 16.88,59.34 U19.27
N94564: length 10.6
  TOP w0.152: Y2.2 v1(10.78,26.55) 10.78,27.57 17.43,27.57 U2.1
N94576: length 10.8
  TOP w0.152: Y2.1 v1(9.33,26.55) 9.33,28.18 16.16,28.18 U2.2
N95840: length 43.3
  TOP w0.152: D1.2 46.27,58.97 47.24,58.97 47.24,37.21 v1(28.93,37.21)
  BOTTOM w0.152: U3.10 v1(28.93,37.21)
N95896: length 2.8
  TOP w0.152: R7.2 42.56,59.84 v1(42.56,59.83) D1.1
N117689: length 12.1
  TOP w0.152: D5.2 v1(11.5,10.67) 7.07,10.67 CN3.2
N118450: length 87.5
  TOP w0.152: U18.2 19.32,19.5 v1(19.32,20.15) U18.1 ; R25.1 v1(34.26,63.8)
  BOTTOM w0.152: v1(19.32,20.15) 14.43,20.15 14.43,31.97 8.88,31.97 8.88,55.18 30.15,55.18 30.15,63.8 v1(34.26,63.8)
N147126: length 140.4
  TOP w0.152: v1(113.23,49.76) 51.93,49.76 51.93,35.09 14.89,35.09 U2.3
  BOTTOM w0.152: BT1.3 113.23,47.43 v1(113.23,49.76) 113.23,64.81 BT1.1
N705510: length 14.5
  TOP w0.152: v1(37.43,74.68) 46.34,74.68 D9.2 ; R34.1 v1(37.43,72.64)
  BOTTOM w0.152: v1(37.43,72.64) v1(37.43,74.68)
N709150: length 11.5
  TOP w0.152: R33.1 38.94,66.99 v1(41.08,66.99) 41.61,66.99 41.61,67.3 42.53,67.3 42.53,69.02 46.34,69.02 D8.2
N742370: length 21.6
  TOP w0.152: F2.1 v1(4.38,50.35) 4.92,50.35 4.92,56.3 4.56,56.3 4.56,60.22 3.51,60.22 3.51,65.01 5.23,65.01 5.23,65.18 CN4.1
N1183820: length 3.2
  TOP w0.152: R24.2 v1(94.94,24.73) D6.2
N1184920: length 7.4
  TOP w0.152: D7.2 46.3,64.97 42.5,64.97 v1(42.5,64.39) 42.5,63.8 R25.2
N1866050: length 8
  TOP w0.152: D13.2 122.9,41.41 v1(119.68,41.41) 117.25,41.41 R39.1
N1976830: length 6.6
  TOP w0.152: R40.1 77.2,14.8 v1(74.1,14.8) 72.97,14.8 D14.2
